# Altium PCB PCB1.PcbDoc (part 6 of 6)
Units mil, origin at the board's own origin, x right, y up, seen from the top; angles counter-clockwise.
Board outline 1280 x 1960 mil, 2 copper layers (Top Layer, Bottom Layer); 44 components, 63 nets, 315 pads, 89 vias.
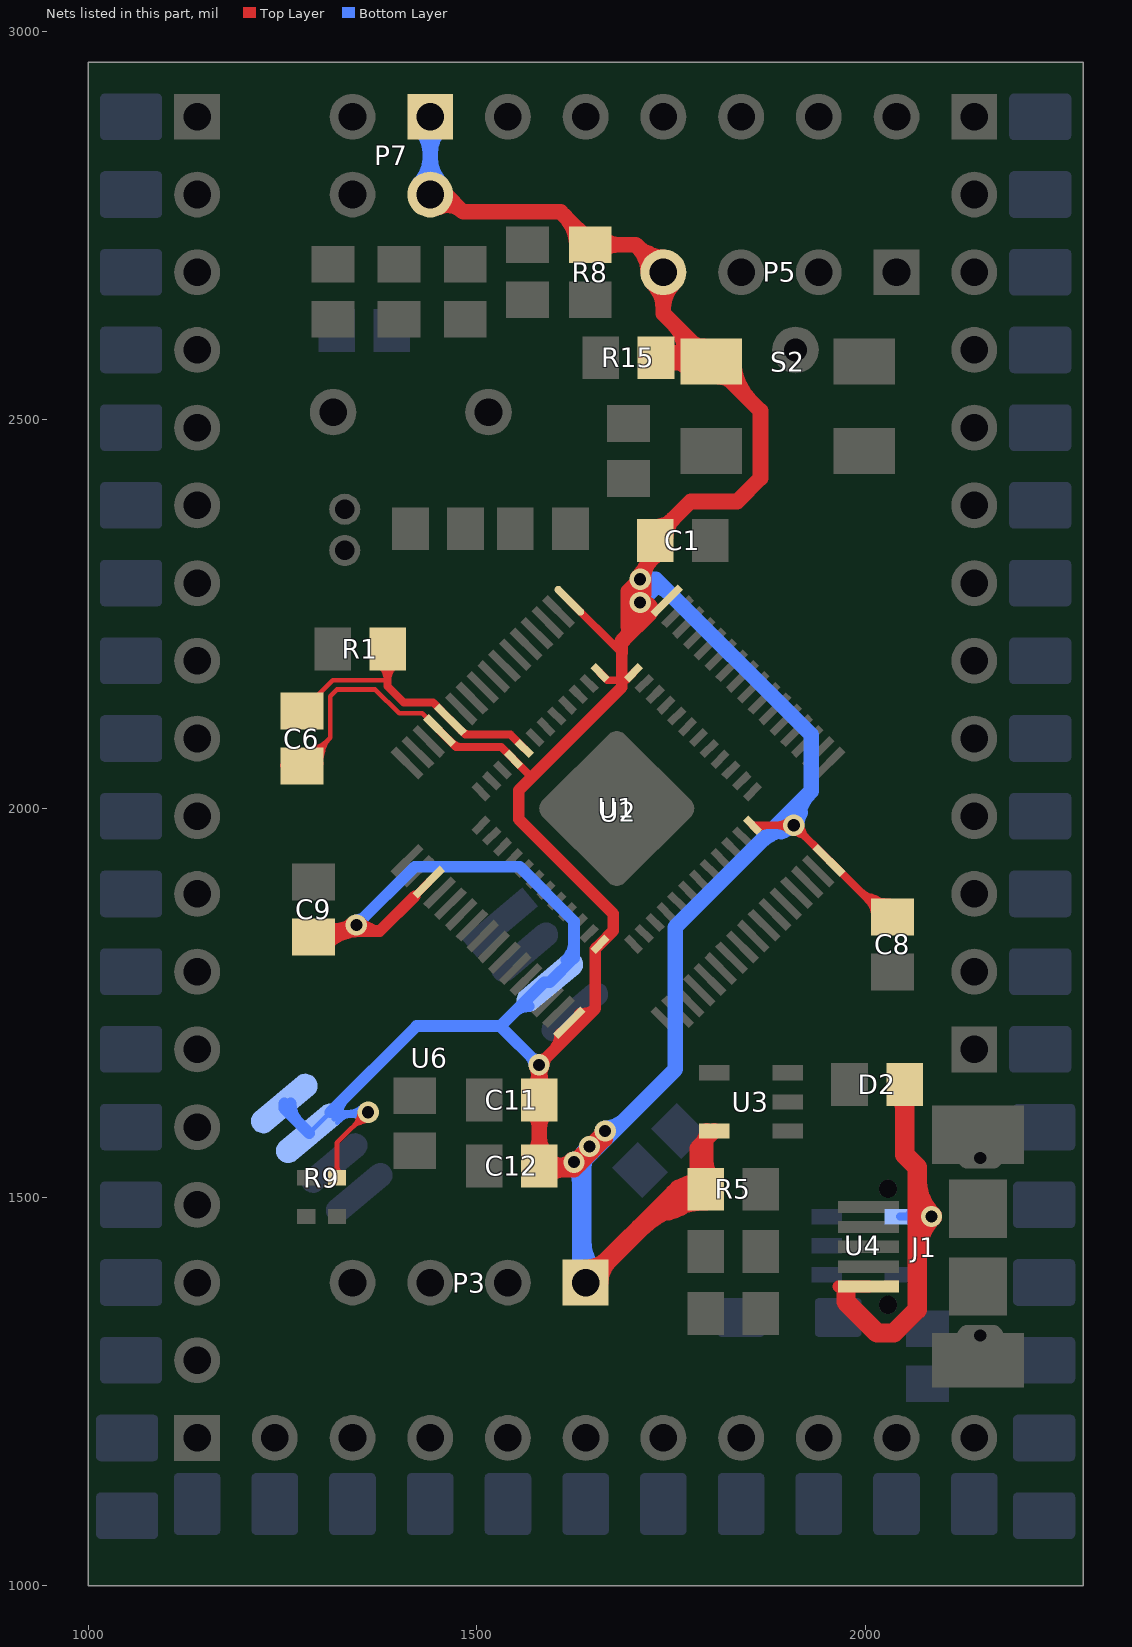
[diagram p6: the nets of this part, all layers, seen from the top]

## Via types
v1: diameter 27.56, hole 15.75, Top Layer to Bottom Layer, tented both sides, 85 vias
v2: diameter 23.62, hole 13.78, Top Layer to Bottom Layer, tented both sides, 4 vias

## Nets (pads, with @x,y where several pads share a name; then routed paths per layer and width w, separated by ;. In a path a pad name is that pad's centre, name@x,y a point inside that pad or via, vN(x,y) a via of type N, cw(c..) or ccw(c..) an arc to the next point about the centre after c; other vN are vias at no path point) (continued)
VCC: C1.1 C6.1 C8.1 C9.1 C11.1 C12.1 P3.1 P5.4 P7.1 P7.2 R5.2 R8.1 R9.1 R15.1 S2.2 U1.1 U1.9 U1.24 U1.36 U1.48 U2.1 U2.13 U2.19 U2.32 U2.48 U2.64 U3.5 U6.3 U6.7 U6.8 | length 12393.1
  Top Layer w6: C6.1@1250,2054.57 C6.1@1250,2056.25 ; C6.1@1269.64,2055.79 cw(c1295.87,2052.34) C6.1@1289.02,2077.89 ; C6.1@1275,2054.57 1311.56,2091.13 ; C6.1@1275.59,2055.01 cw(c1305.51,2051.06) 1297.7,2080.22 ; C6.1@1283.96,2046.65 ccw(c1262.34,2080.71) C6.1@1302.2,2074.5 ; R9.1@1320,1525 1320,1570 v1@1360,1610 ; 1346.23,1597.85 cw(c1362.64,1593.45) v1@1359.8,1610.2 ; 1347.8,1594.95 ccw(c1342.95,1613.06) v1@1361.19,1608.72 ; U2.13@1452,2100.2 1429.89,2122.32 1400.07,2122.32 1369.39,2153 1320,2153 1311.56,2144.56 1311.56,2091.13 ; 1311.56,2091.13 ccw(c1341.4,2061.29) 1299.44,2056.77 cw(c1341.4,2061.29) 1311.56,2091.13 ; 1320,1541.52 ccw(c1336.52,1541.52) 1324.84,1529.84 cw(c1336.52,1541.52) 1320,1541.52 ; 1320,1541.52 cw(c1303.48,1541.52) 1315.16,1529.84 ccw(c1303.48,1541.52) 1320,1541.52 ; C6.1@1278.94,2069.19 ccw(c1278.94,2094.99) 1297.18,2076.75 cw(c1278.94,2094.99) C6.1@1278.94,2069.19 ; C6.1@1278.94,2075.19 ccw(c1278.94,2115.47) 1307.42,2086.99 cw(c1278.94,2115.47) C6.1@1278.94,2075.19 ; C6.1@1287.51,2055.49 cw(c1309.37,2057.84) 1293.82,2073.39 ccw(c1309.37,2057.84) C6.1@1287.51,2055.49 ; C6.1@1293.48,2056.13 cw(c1325.38,2059.57) 1302.69,2082.26 ccw(c1325.38,2059.57) C6.1@1293.48,2056.13 ; 1339.89,1589.89 cw(c1360,1569.78) 1360,1598.22 ccw(c1360,1569.78) 1339.89,1589.89 ; 1342.31,1592.31 ccw(c1325.61,1609) 1349.22,1609 cw(c1325.61,1609) 1342.31,1592.31
  Top Layer w10: 1420,1887.25 U2.19@1438.08,1905.33 ; U2.13@1452,2100.2 1473.21,2079 1531.4,2079 U1.9@1547.07,2063.33 1570,2040.4 1570,2039.51 ; C11.1@1580.43,1625 C11.1@1580.43,1644.57 ; U2.1@1619.04,2267.24 1686.27,2200 1686.97,2200 ; U1.1@1658.42,2174.69 1668.11,2165 1686.27,2165 1691.89,2165 U1.48@1701.58,2174.69 ; v1(1710,2265) 1713.98,2268.98 1720,2275 1720,2306.57 1716.73,2309.84 ; U1.36@1854.69,1978.42 v1(1907.85,1978.42) U2.48@1953.1,1933.17 2025.84,1860.43 C8.1@2035,1860.43 ; v1@1906.65,1978.18 ccw(c1920.72,1981.06) 1917,1967.19 ; v1@1908.09,1979.62 cw(c1905.21,1965.56) 1919.08,1969.27 ; 2006.89,1885.53 cw(c1997.45,1850.29) C8.1@2032.38,1860.83 ; 1886.65,1978.42 ccw(c1886.65,1999.62) 1901.64,1984.63 cw(c1886.65,1999.62) 1886.65,1978.42 ; 1886.65,1978.42 cw(c1886.65,1957.23) 1901.64,1972.22 ccw(c1886.65,1957.23) 1886.65,1978.42 ; 1922.84,1963.44 ccw(c1907.85,1948.45) 1907.85,1969.64 cw(c1907.85,1948.45) 1922.84,1963.44 ; 1922.84,1963.44 cw(c1937.82,1978.42) 1916.63,1978.42 ccw(c1937.82,1978.42) 1922.84,1963.44 ; U2.13@1466.15,2086.06 ccw(c1483.19,2103.11) 1483.19,2079 cw(c1483.19,2103.11) U2.13@1466.15,2086.06 ; U1.36@1860.2,1972.91 cw(c1873.51,1959.6) 1873.51,1978.42 ccw(c1873.51,1959.6) U1.36@1860.2,1972.91 ; 1990.35,1895.92 ccw(c2031.06,1936.63) 2031.06,1879.06 cw(c2031.06,1936.63) 1990.35,1895.92 ; 2002.97,1883.3 cw(c1980.1,1860.43) 2012.44,1860.43 ccw(c1980.1,1860.43) 2002.97,1883.3 ; 2007.42,1878.85 ccw(c2031.06,1902.49) 2031.06,1869.06 cw(c2031.06,1902.49) 2007.42,1878.85
  Top Layer w15: C9.1@1290,1834.57 1297.68,1842.25 1375,1842.25 ; C9.1@1302,1848.53 ccw(c1316.39,1873.46) 1323.84,1845.65 ; C9.1@1308,1826.68 cw(c1349.1,1803.64) v1@1336.9,1849.16 ; 1323.28,1841.29 cw(c1336.52,1818.35) v1@1343.37,1843.93 ; 1324.93,1845.42 cw(c1332.71,1831.94) v1@1341.47,1844.81 ; v1@1348.93,1845.1 cw(c1355.7,1836.65) 1361.93,1845.51 ; 1420,1887.25 1375,1842.25 ; C11.1@1580.43,1644.57 1580.43,1670.43 1652.5,1742.5 ; 1686.27,2200 1686.27,2165 1686.27,2155.78 1570,2039.51 1554,2023.5 1554,1986 1675.53,1864.47 1675.53,1842.42 U1.24@1658.42,1825.31 1652.5,1819.39 1652.5,1742.5 ; 1686.97,2200 1686.97,2215.28 ; 1375,1842.25 cw(c1375,1875.05) 1349.82,1854.03 ccw(c1375,1875.05) 1375,1842.25 ; v1@1574.56,1666.86 cw(c1558.56,1657.62) 1576.41,1652.84 ; v1@1574.56,1666.86 cw(c1558.56,1657.62) 1576.41,1652.84 ; v1@1574.56,1666.86 cw(c1558.56,1657.62) 1576.41,1652.84 ; v1@1576.86,1664.56 cw(c1569.51,1651.83) 1583.71,1655.64 ; v1@1576.86,1664.56 cw(c1569.51,1651.83) 1583.71,1655.64 ; v1@1576.86,1664.56 cw(c1569.51,1651.83) 1583.71,1655.64 ; v1@1580.43,1667.86 ccw(c1619.36,1667.86) 1591.83,1640.34 cw(c1619.36,1667.86) v1@1580.43,1667.86 ; v1@1580.43,1667.86 cw(c1541.51,1667.86) 1569.03,1640.34 ccw(c1541.51,1667.86) v1@1580.43,1667.86 ; 1583.88,1655 cw(c1598.97,1659.05) v1@1585.44,1666.86 ; 1583.88,1655 cw(c1598.97,1659.05) v1@1585.44,1666.86 ; 1583.88,1655 cw(c1598.97,1659.05) v1@1585.44,1666.86 ; 1590.72,1680.72 ccw(c1601.44,1670) 1586.28,1670 cw(c1601.44,1670) 1590.72,1680.72 ; 1590.72,1680.72 cw(c1580,1691.44) 1580,1676.28 ccw(c1580,1691.44) 1590.72,1680.72 ; 1652.5,1742.5 cw(c1636.28,1758.71) 1632.8,1736.05 ccw(c1636.28,1758.71) 1652.5,1742.5 ; C9.1@1305.34,1823.17 cw(c1351.4,1777.1) 1351.4,1842.25 ccw(c1351.4,1777.1) C9.1@1305.34,1823.17 ; C9.1@1311.12,1842.25 ccw(c1311.12,1883.88) 1340.56,1854.44 cw(c1311.12,1883.88) C9.1@1311.12,1842.25 ; v1@1575.56,1665.56 cw(c1563.79,1653.79) 1580.43,1653.79 ccw(c1563.79,1653.79) v1@1575.56,1665.56 ; 1580.43,1655.89 cw(c1594.11,1655.89) 1584.44,1665.56 ccw(c1594.11,1655.89) 1580.43,1655.89 ; 1598.31,1688.31 ccw(c1576.39,1710.24) 1607.39,1710.24 cw(c1576.39,1710.24) 1598.31,1688.31
  Top Layer w20: P7.2@1440,2790 1460,2790 1482.28,2767.72 ; C11.1@1580.43,1605 C12.1@1580.43,1540 C12.1@1600,1540 ; C12.1@1590.07,1526.43 cw(c1610.39,1506.11) 1610.39,1534.85 ; C12.1@1590.07,1530.37 cw(c1613.32,1507.11) 1613.32,1540 cw(c1613.32,1572.89) C12.1@1590.07,1549.63 ; C12.1@1590.07,1545.7 ccw(c1616.25,1571.88) v1@1616.25,1534.85 ; C12.1@1591.36,1527.93 cw(c1605.15,1517.65) 1605.15,1534.85 ; C12.1@1592.46,1542.47 ccw(c1605.15,1549.23) 1605.15,1534.85 ; C12.1@1603.8,1540 ccw(c1603.8,1566.2) v1@1622.33,1547.67 ; v1@1621.45,1546.28 cw(c1605.15,1552.18) 1605.15,1534.85 ; v1@1625,1548.78 ccw(c1625,1582.77) v1@1649.04,1558.74 ; v1@1630.08,1547.79 ccw(c1618.84,1567.26) v1@1641.23,1565.32 ; v1@1631.26,1540.96 ccw(c1607.23,1565) v1@1641.22,1565 ; v1@1645.69,1568.72 ccw(c1649.67,1590.03) v1@1665,1574.7 ; v1@1650.82,1566.51 ccw(c1640.42,1584.53) v1@1661.22,1584.93 ; v1@1651.26,1560.96 ccw(c1627.23,1585) v1@1661.22,1585 ; 1698.32,2230.49 1695,2233.81 1695,2279.59 1707.54,2292.13 cw(c1697.71,2280.67) 1710.43,2272.53 1713.98,2268.98 1723.23,2259.73 1723.23,2251.55 1686.97,2215.28 ccw(c1640.33,2261.93) v1@1706.22,2264.83 ; v1@1707.33,2297.67 ccw(c1664.66,2340.34) C1.1@1725,2340.34 ; v1(1710,2265) 1710,2280 ; 1714.08,2713.86 ccw(c1746.68,2722.6) P5.4@1739.91,2689.54 ; v1@1715.02,2303.11 cw(c1754.72,2292.47) C1.1@1735.83,2328.97 ; 1716.14,2715.92 cw(c1707.4,2683.32) P5.4@1740.46,2690.09 ; C1.1@1725,2345 1775,2395 1835,2395 1865,2425 1865,2511.57 S2.2@1796.57,2580 ; R15.1@1725.43,2580 S2.2@1796.57,2580 ; R15.1@1740.07,2574.3 cw(c1761.72,2552.65) 1761.72,2583.27 ; R15.1@1740.07,2593.57 ccw(c1764.92,2618.42) S2.2@1764.92,2583.27 ; R15.1@1741.29,2567.84 cw(c1753.42,2558.64) 1757.36,2573.34 ; R15.1@1745.59,2588.45 cw(c1733.46,2543.18) S2.2@1774.59,2565.64 ; R15.1@1748.92,2587.56 ccw(c1760.19,2629.63) S2.2@1781.97,2591.91 ; 1764.29,2604.55 ccw(c1807,2616) S2.2@1791.57,2574.56 ; R5.2@1792.89,1510 R5.2@1794.57,1510 1794.57,1574.05 ; U3.5@1805.51,1585 1794.57,1574.05 ; 1482.28,2767.72 ccw(c1462.3,2747.73) 1449.11,2772.73 cw(c1462.3,2747.73) 1482.28,2767.72 ; 1482.28,2767.72 1607.72,2767.72 1650,2725.43 1704.57,2725.43 P5.4@1740,2690 1740,2636.57 S2.2@1796.57,2580 ; 1580.43,1588.18 ccw(c1547.55,1588.18) 1570.8,1611.43 cw(c1547.55,1588.18) 1580.43,1588.18 ; 1580.43,1588.18 cw(c1613.32,1588.18) 1590.07,1611.43 ccw(c1613.32,1588.18) 1580.43,1588.18 ; C12.1@1600,1540 1605.15,1534.85 ; C12.1@1600,1540 1620,1540 v1(1625,1545) v1(1645,1565) v1(1665,1585) v1@1665,1574.7 ; 1605.15,1534.85 1625.15,1534.85 v1@1665,1574.7 ; 1682.69,2725.43 ccw(c1682.69,2692.55) 1659.44,2715.8 cw(c1682.69,2692.55) 1682.69,2725.43 ; 1682.69,2725.43 cw(c1682.69,2758.32) 1659.44,2735.06 ccw(c1682.69,2758.32) 1682.69,2725.43 ; 1706.66,2723.34 ccw(c1740,2756.67) 1740,2709.53 cw(c1740,2756.67) 1706.66,2723.34 ; 1706.66,2723.34 cw(c1673.33,2690) 1720.47,2690 ccw(c1673.33,2690) 1706.66,2723.34 ; 1740,2642.86 ccw(c1692.86,2642.86) 1726.19,2676.19 cw(c1692.86,2642.86) 1740,2642.86 ; 1740,2642.86 cw(c1787.14,2642.86) 1753.81,2676.19 ccw(c1787.14,2642.86) 1740,2642.86 ; R15.1@1751.1,2583.27 ccw(c1758.95,2612.58) S2.2@1778.9,2589.72 ; R15.1@1751.1,2583.27 ccw(c1758.95,2612.58) S2.2@1778.9,2589.72 ; R15.1@1751.1,2583.27 ccw(c1758.95,2612.58) S2.2@1778.9,2589.72 ; R15.1@1751.43,2583.19 cw(c1741.46,2545.97) S2.2@1774.82,2565.24 ; R15.1@1751.43,2583.19 cw(c1741.46,2545.97) S2.2@1774.82,2565.24 ; R15.1@1751.43,2583.19 cw(c1741.46,2545.97) S2.2@1774.82,2565.24 ; S2.2@1763.32,2580 ccw(c1763.32,2547.11) 1740.07,2570.37 cw(c1763.32,2547.11) S2.2@1763.32,2580 ; S2.2@1763.32,2580 cw(c1763.32,2612.89) 1740.07,2589.63 ccw(c1763.32,2612.89) S2.2@1763.32,2580 ; 1783.57,1538.57 ccw(c1794.58,1538.57) 1794.57,1527.56 cw(c1794.58,1538.57) 1783.57,1538.57 ; 1783.57,1538.57 1783.57,1563.06 ; 1783.57,1563.05 ccw(c1831.25,1563.05) 1802.72,1524.85 cw(c1831.25,1563.05) 1783.57,1563.05 ; 1783.57,1563.06 1794.57,1574.05 ; 1794.57,1546.82 ccw(c1827.45,1546.82) 1804.2,1523.57 cw(c1827.45,1546.82) 1794.57,1546.82 ; 1794.57,1546.82 cw(c1761.68,1546.82) 1784.93,1523.57 ccw(c1761.68,1546.82) 1794.57,1546.82 ; C12.1@1570.8,1553.57 ccw(c1547.55,1576.82) 1580.43,1576.82 cw(c1547.55,1576.82) C12.1@1570.8,1553.57 ; 1580.43,1576.83 ccw(c1613.32,1576.83) 1590.07,1553.57 cw(c1613.32,1576.83) 1580.43,1576.83 ; 1612.97,2762.46 cw(c1575.94,2725.43) 1628.31,2725.43 ccw(c1575.94,2725.43) 1612.97,2762.46 ; C1.1@1729.57,2362.56 ccw(c1729.57,2393.93) 1751.75,2371.75 cw(c1729.57,2393.93) C1.1@1729.57,2362.56 ; R15.1@1732.52,2580 cw(c1732.52,2515.79) 1777.92,2561.19 ccw(c1732.52,2515.79) R15.1@1732.52,2580 ; C1.1@1743.19,2348.94 cw(c1777.59,2348.94) 1753.26,2373.27 ccw(c1777.59,2348.94) C1.1@1743.19,2348.94 ; 1751.44,2625.14 cw(c1701.3,2575) 1772.2,2575 ccw(c1701.3,2575) 1751.44,2625.14 ; 1756.66,2580 ccw(c1756.66,2610.07) 1777.92,2588.81 cw(c1756.66,2610.07) 1756.66,2580 ; S2.2@1775.2,2601.38 ccw(c1791.73,2617.91) 1791.73,2594.53 cw(c1791.73,2617.91) S2.2@1775.2,2601.38 ; 1788.98,1568.47 ccw(c1772.45,1585) 1795.83,1585 cw(c1772.45,1585) 1788.98,1568.47 ; S2.2@1811.42,2555.47 cw(c1811.42,2532.09) 1827.95,2548.62 ccw(c1811.42,2532.09) S2.2@1811.42,2555.47 ; S2.2@1830.94,2575 ccw(c1901.85,2575) 1851.71,2524.86 cw(c1901.85,2575) S2.2@1830.94,2575
  Top Layer w25: P3.1@1640,1390 1760,1510 R5.2@1792.89,1510 ; 1746.36,1482.02 ccw(c1729.92,1543.39) R5.2@1784.93,1511.62 ; P3.1@1669.07,1419.07 ccw(c1698.14,1390) 1657.03,1390 cw(c1698.14,1390) P3.1@1669.07,1419.07 ; P3.1@1669.07,1419.07 cw(c1640,1448.14) 1640,1407.03 ccw(c1640,1448.14) P3.1@1669.07,1419.07 ; 1767.72,1510 ccw(c1767.72,1536.85) 1786.7,1517.86 cw(c1767.72,1536.85) 1767.72,1510 ; 1767.72,1510 cw(c1767.72,1483.15) 1786.7,1502.14 ccw(c1767.72,1483.15) 1767.72,1510 ; 1709.85,1459.85 cw(c1794.57,1375.14) 1794.57,1494.94 ccw(c1794.57,1375.14) 1709.85,1459.85 ; 1752.53,1502.53 cw(c1794.57,1460.49) 1794.57,1519.94 ccw(c1794.57,1460.49) 1752.53,1502.53
  Bottom Layer w6: U6.7@1284.35,1582.03 1311.32,1609 v1(1360,1609) ; 1333.14,1603.84 cw(c1339.56,1579.91) v1@1353.8,1600.18 ; 1333.14,1603.84 cw(c1339.56,1579.91) v1@1353.8,1600.18 ; 1333.14,1603.84 cw(c1339.56,1579.91) v1@1353.8,1600.18 ; 1333.98,1609 ccw(c1333.98,1635.02) 1352.38,1616.62 cw(c1333.98,1635.02) 1333.98,1609 ; 1333.98,1609 cw(c1333.98,1582.98) 1352.38,1601.38 ccw(c1333.98,1582.98) 1333.98,1609 ; 1338.94,1605.4 ccw(c1333.95,1624.04) v1@1350.66,1614.39 ; 1338.94,1605.4 ccw(c1333.95,1624.04) v1@1350.66,1614.39 ; 1338.94,1605.4 ccw(c1333.95,1624.04) v1@1350.66,1614.39 ; 1345.54,1607.16 cw(c1349.18,1593.6) v1@1357.25,1605.09 ; 1345.54,1607.16 cw(c1349.18,1593.6) v1@1357.25,1605.09 ; 1345.54,1607.16 cw(c1349.18,1593.6) v1@1357.25,1605.09 ; U6.7@1316.27,1600.04 cw(c1337.91,1578.4) 1337.91,1609 ccw(c1337.91,1578.4) U6.7@1316.27,1600.04 ; U6.7@1320.51,1595.79 cw(c1352.39,1563.91) 1352.39,1609 ccw(c1352.39,1563.91) U6.7@1320.51,1595.79 ; U6.7@1320.51,1613.82 ccw(c1332.15,1625.46) 1332.15,1609 cw(c1332.15,1625.46) U6.7@1320.51,1613.82
  Bottom Layer w15: U6.8@1252.21,1620.33 1252.21,1614.17 U6.7@1284.35,1582.03 ; U6.7@1311.32,1609 1422.32,1720 1530,1720 ; v1(1345,1850) 1420,1925 1555,1925 1625,1855 1625,1807.59 U6.3@1593.96,1776.55 1586.55,1776.55 1530,1720 ; v1(1580,1670) 1530,1720 ; 1355.72,1860.72 ccw(c1366.44,1850) 1351.28,1850 cw(c1366.44,1850) 1355.72,1860.72 ; 1355.72,1860.72 cw(c1345,1871.44) 1345,1856.28 ccw(c1345,1871.44) 1355.72,1860.72 ; 1569.28,1680.72 ccw(c1580,1691.44) 1580,1676.28 cw(c1580,1691.44) 1569.28,1680.72 ; 1569.28,1680.72 cw(c1558.56,1670) 1573.72,1670 ccw(c1558.56,1670) 1569.28,1680.72 ; U6.8@1260.46,1620.33 ccw(c1295.25,1620.33) 1270.65,1595.73 cw(c1295.25,1620.33) U6.8@1260.46,1620.33 ; U6.7@1319.74,1604.81 cw(c1350.2,1604.81) 1328.66,1626.34 ccw(c1350.2,1604.81) U6.7@1319.74,1604.81 ; 1547.55,1737.55 cw(c1566.81,1718.28) 1566.81,1745.53 ccw(c1566.81,1718.28) 1547.55,1737.55 ; U6.3@1615.27,1805.16 ccw(c1591.78,1828.65) 1625,1828.65 cw(c1591.78,1828.65) U6.3@1615.27,1805.16
  Bottom Layer w20: P7.2@1440,2790 P7.1@1440,2890 ; v1@1625,1548.78 ccw(c1625,1584.48) v1@1650.25,1559.24 ; v1@1630.43,1547.8 ccw(c1619.6,1566.56) v1@1641.23,1565.23 ; v1@1641.29,1564.3 cw(c1618.89,1560.11) 1635,1543.99 1755.22,1664.21 1755.22,1847.34 1930,2022.11 1930,2095 1730,2295 v1(1710,2295) v1(1710,2265) 1729.3,2284.3 ; v1@1645,1568.78 ccw(c1645,1604.48) v1@1670.25,1579.24 ; v1@1650.43,1567.8 ccw(c1639.6,1586.56) v1@1661.23,1585.23 ; v1@1650.76,1559.75 ccw(c1625.52,1585) v1@1661.22,1585 ; v1@1665,1588.78 ccw(c1665,1624.48) 1690.25,1599.24 ; v1@1713.27,2296.89 ccw(c1731.97,2307.68) 1726.38,2286.83 ; 1891.47,1970.25 ccw(c1885.88,1991.11) v1@1904.57,1980.31 ; v1@1905.96,1981.7 ccw(c1895.16,2000.39) 1916.02,1994.81 ; 1440,2837.14 ccw(c1487.14,2837.14) 1453.81,2803.81 cw(c1487.14,2837.14) 1440,2837.14 ; 1440,2837.14 cw(c1392.86,2837.14) 1426.19,2803.81 ccw(c1392.86,2837.14) 1440,2837.14 ; 1440,2842.86 ccw(c1392.86,2842.86) 1426.19,2876.19 cw(c1392.86,2842.86) 1440,2842.86 ; 1440,2842.86 cw(c1487.14,2842.86) 1453.81,2876.19 ccw(c1487.14,2842.86) 1440,2842.86 ; v1@1710,2291.22 cw(c1710,2233.81) 1750.59,2274.41 ccw(c1710,2233.81) v1@1710,2291.22 ; 1864.63,1956.74 cw(c1907.85,1913.52) 1907.85,1974.64 ccw(c1907.85,1913.52) 1864.63,1956.74 ; 1891.63,1978.42 cw(c1904.47,1978.42) 1895.39,1987.5 ccw(c1904.47,1978.42) 1891.63,1978.42 ; 1898.77,1990.88 cw(c1907.85,1981.81) 1907.85,1994.64 ccw(c1907.85,1981.81) 1898.77,1990.88 ; v1@1911.63,1978.42 cw(c1972.75,1978.42) 1929.53,2021.65 ccw(c1972.75,1978.42) v1@1911.63,1978.42
  Bottom Layer w25: v1@1624.1,1544.1 cw(c1597.77,1517.77) 1635,1517.77 ; v1@1635,1537.77 cw(c1672.23,1537.77) v1@1645.9,1564.1 ; v1@1635,1541.73 cw(c1663.36,1541.73) v1@1645.79,1564 ; v1@1635,1543.99 1635,1420 ; 1635,1420 ccw(c1649.41,1420) 1645.1,1406.25 cw(c1649.41,1420) 1635,1420 ; 1635,1443.18 ccw(c1693.18,1443.18) 1652.04,1402.04 cw(c1693.18,1443.18) 1635,1443.18
VCC5V: D2.1 J1.1 U4.4 | length 916.8
  Top Layer w15: J1.1@1964.82,1384.82 J1.1@2004.13,1384.82
  Top Layer w25: 1975,1375 1975,1365 2015,1325 2036.5,1325 2066.5,1355 2066.5,1538.5 2050.43,1554.57 D2.1@2050.43,1645 ; 2050.43,1614.21 ccw(c2023.58,1614.21) 2042.57,1633.2 cw(c2023.58,1614.21) 2050.43,1614.21 ; 2050.43,1614.21 cw(c2077.28,1614.21) 2058.3,1633.2 ccw(c2077.28,1614.21) 2050.43,1614.21 ; 2066.5,1427.25 cw(c2132.75,1427.25) 2085.9,1474.1 ccw(c2132.75,1427.25) 2066.5,1427.25 ; 2066.5,1522.75 ccw(c2132.75,1522.75) 2085.9,1475.9 cw(c2132.75,1522.75) 2066.5,1522.75
  Bottom Layer w10: U4.4@2044.49,1474.8 2084.8,1474.8 v1(2085,1475) ; U4.4@2056.99,1478.85 ccw(c2066.09,1492.66) 2070.37,1476.69 ; 2066.02,1474.8 ccw(c2066.02,1463.11) 2057.75,1471.38 cw(c2066.02,1463.11) 2066.02,1474.8 ; 2066.02,1474.8 cw(c2066.02,1486.49) 2057.75,1478.23 ccw(c2066.02,1486.49) 2066.02,1474.8 ; U4.4@2063.33,1474.8 ccw(c2063.33,1496.67) 2078.79,1481.21 cw(c2063.33,1496.67) U4.4@2063.33,1474.8 ; 2064.28,1474.8 cw(c2064.28,1454.28) 2078.79,1468.79 ccw(c2064.28,1454.28) 2064.28,1474.8
VSSA: C6.2 R1.1 U1.8 U2.12 | length 507.9
  Top Layer w6: C6.2@1275,2125.43 1314.57,2165 1385,2165 ; R1.1@1385.43,2185.43 R1.1@1385.43,2205
  Top Layer w10: R1.1@1385.43,2185.43 1385,2185 1385,2165 ; U1.8@1560.99,2077.25 1543.24,2095 1485.05,2095 U2.12@1465.92,2114.12 1443.73,2136.32 1405.87,2136.32 1385,2157.19 1385,2165 ; 1385,2165 ccw(c1358.77,2165) 1374.36,2186.09 cw(c1358.77,2165) 1385,2165 ; 1385,2165 cw(c1410.03,2165) 1395.93,2185.68 ccw(c1410.03,2165) 1385,2165 ; U2.12@1480.07,2099.98 ccw(c1492.09,2112) 1492.09,2095 cw(c1492.09,2112) U2.12@1480.07,2099.98
pads on no net: J1.0@2029,1361.2 J1.0@2029,1510.8 J1.5 U3.4 U4.1
copper on no net:
  other v1: 1190,2890 1225,2890 1255,2890 1290,2890

## Polygon pours and split planes (outlines as drawn)
GND on Bottom Layer "Top Layer-No Net" (solid, remove dead copper, pour order 2): 2040,1644.64 2045.36,1650 2120,1650 2125,1650 2140,1635 2140,1505 2140,1325 2140,1240 2135,1240 2120,1225 1915,1225 1320,1225 1295,1250 1280,1265 1280,1394.3 1440,1554.3 1440,1680 1440,1554.3 1555.7,1670 1580,1670 1580,1710 1585,1715 1640,1770 1655,1770 1655,1777.59 1625,1807.59 1625,1855 1555,1925 1420,1925 1345,1850 1340,1845 1270,1845 1200,1915 1180,1935 1180,2020 1180,2050 1200,2070 1285,2070 1285,2065 1325,2025 1450,2150 1450,2178.94 1450,2189.78 1429.78,2210 1435,2215.22 1435,2244 1281,2244 1241,2284 1241,2789 1241,2801 1270,2830 1275,2835 1360,2835 1375,2835 1405,2805 1405,2765 1405,2760 1415,2750 1420,2745 1640,2745 1648.22,2736.78 1648.22,2611.48 1707,2552.7 1705,2550.7 1705,2405.04 1655.22,2355.26 1655,2355.04 1655,2222 1638,2205 1639.13,2203.87 1639.13,2171.09 1685.22,2217.18 1865,2037.4 1865,2030 1865,2005 1855,1995 1750,1890 1750,1669.43 1755.22,1664.21 1635.1,1544.1 1624.1,1544.1 1624.1,1539.1 1515,1430 1445,1430 1445,1395 1440,1390 1470,1360 1485,1360 1495,1360 1526.53,1328.47 1528.06,1330 1705,1330 1825,1330 1840,1345 1845,1340 1905,1340 1905,1355 1950,1400 1965,1400 1965,1480 1950,1480 1950,1554.64
GND on Top Layer "Top Layer-No Net" (solid, remove dead copper, pour order 4): 1228.5,2125 1228.5,2146.5 1215,2160 1215,2290 1215,2780 1220,2785 1272.14,2837.14 1340,2837.14 1372.86,2837.14 1400,2810 1405,2805 1405,2760 1405,2755 1415,2745 1600,2745 1615,2730 1600,2745 1595,2745 1585,2745 1540.43,2700.43 1470,2700.43 1470,2635 1475,2630 1482.36,2622.64 1609.81,2622.64 1609.81,2620.19 1645,2585 1695,2535 1695,2495.43 1695,2419.88 1691.06,2415.94 1691.06,2405.94 1691.06,2381.01 1680,2369.94 1680,2345 1680,2330 1640,2290 1578.94,2290

## Keep-outs
Keep-Out Layer:
  lines w6: 995,1035 995,2960 2285,2960 2285,1035 995,1035

## Other copper
Top Layer:
  rectangle net GND: 1995,1487.18 2010,1530

## Silkscreen, mask and mechanical layers (free items; w line width, h text height)
Top Overlay:
  lines w10: 1190,1490 1210,1490 1210,1300 1230,1280 ; 1190,2375 1220,2375 1220,2545 ; 1195,1590 1225,1590 1225,1900 ; 1195,2290 1225,2290 1225,1980 ; 1220,2620 1220,2760 ; 1300,1270 1625,1270 1635,1260 1635,1240 ; 1740,1240 1740,1260 1750,1270 1850,1270 ; 1920,1270 1975,1270 ; 2050,2175 2050,1990 2085,1990 ; 2050,2240 2050,2345
  text "." at 1055,2920 h60
  text "C0" at 1005,2870 h75
  text "B3" at 2200,2870 h75
  text "." at 1055,2820 h60
  text "." at 2260,2820 h60
  text "3V3" at 1285,2785 h75 r90
  text "GND" at 1240,2775 h75 r90
  text "C1" at 1005,2770 h75
  text "D2" at 2200,2770 h75
  text "B9" at 1555,2760 h75 r90
  text "B8" at 1655,2760 h75 r90
  text "B7" at 1755,2760 h75 r90
  text "B6" at 1855,2760 h75 r90
  text "B5" at 1955,2760 h75 r90
  text "B4" at 2065,2760 h75 r90
  text "." at 1055,2720 h60
  text "C" at 2215,2715 h75
  text "C2" at 1005,2670 h75
  text "13" at 2200,2670 h75
  text "." at 2260,2625 h60
  text "." at 1055,2620 h60
  text "C" at 2215,2615 h75
  text "C3" at 1005,2570 h75
  text "12" at 2200,2570 h75
  text "C" at 1195,2560 h100
  text "." at 2260,2525 h60
  text "." at 1055,2520 h60
  text "BT0" at 2081.53,2518.9 h75 r90
  text "C" at 2215,2515 h75
  text "C4" at 1005,2470 h75
  text "11" at 2200,2470 h75
  text "." at 2260,2425 h60
  text "." at 1055,2420 h60
  text "C" at 2215,2415 h75
  text "RES" at 2080,2380 h75 r90
  text "C5" at 1005,2370 h75
  text "10" at 2200,2370 h75
  text "." at 2260,2320 h60
  text "A0" at 1005,2270 h75
  text "C9" at 2200,2270 h75
  text "VCC" at 1875,2235 h75 r90
  text "GND" at 1925,2235 h75 r90
  text "SWD" at 1975,2235 h75 r90
  text "SCL" at 2025,2235 h75 r90
  text "." at 2260,2220 h60
  text "C" at 2030,2185 h100
  text "A1" at 1005,2170 h75
  text "C8" at 2200,2170 h75
  text "." at 2260,2120 h60
  text "A2" at 1005,2070 h75
  text "C7" at 2200,2070 h75
  text "." at 2260,2020 h60
  text "A3" at 1005,1970 h75
  text "C6" at 2200,1970 h75
  text "A" at 2215,1915 h75
  text "A" at 1195,1910 h100
  text "A4" at 1005,1870 h75
  text "15" at 2200,1870 h75
  text "A" at 2215,1815 h75
  text "A5" at 1005,1770 h75
  text "14" at 2200,1770 h75
  text "SCK" at 1240,1755 h75
  text "A" at 2215,1715 h75
  text "A6" at 1005,1670 h75
  text "13" at 2200,1670 h75
  text "MISO" at 1235,1665 h75
  text "." at 1960,1595 h60
  text "A7" at 1005,1570 h75
  text "MOSI" at 1235,1570 h75
  text "B0" at 1005,1470 h75
  text "BT1" at 1355,1470 h75
  text "B1" at 1005,1370 h75
  text "GND" at 1295,1280 h75
  text "TX" at 1435,1280 h75
  text "RX" at 1535,1280 h75
  text "VCC" at 1635,1280 h75
  text "B2" at 1005,1270 h75
  text "B" at 1240,1250 h100
  text "A" at 1860,1250 h100
  text "B" at 1115,1080 h75 r90
  text "B" at 1215,1080 h75 r90
  text "B" at 1315,1080 h75 r90
  text "B" at 1415,1080 h75 r90
  text "B" at 1515,1080 h75 r90
  text "B" at 1615,1080 h75 r90
  text "A" at 1915,1080 h75 r90
  text "A" at 2015,1080 h75 r90
  text "A" at 2115,1080 h75 r90
  text "10" at 1160,1060 h75 r90
  text "11" at 1265,1060 h75 r90
  text "12" at 1365,1060 h75 r90
  text "13" at 1465,1060 h75 r90
  text "14" at 1565,1060 h75 r90
  text "15" at 1665,1060 h75 r90
  text "A8" at 1765,1060 h75 r90
  text "A9" at 1865,1060 h75 r90
  text "10" at 1965,1060 h75 r90
  text "11" at 2065,1060 h75 r90
  text "12" at 2165,1060 h75 r90
  text "." at 1200,1055 h60
Bottom Overlay:
  text "B9" at 1555,2830 h75 r90
  text "B8" at 1655,2830 h75 r90
  text "B7" at 1755,2830 h75 r90
  text "B6" at 1855,2830 h75 r90
  text "B5" at 1955,2830 h75 r90
  text "B4" at 2020,2830 h75 r90
  text "B3" at 2080,2830 h75 r90
  text "C0" at 1275,2825 h75
  text "C1" at 1275,2770 h75
  text "GND" at 1400,2690 h75
  text "3V3" at 1520,2690 h75
  text "C2" at 1275,2670 h75
  text "D2" at 2085,2605 h75
  text "C3" at 1275,2570 h75
  text "C13" at 2090,2560 h75
  text "SCL" at 1645,2535 h75 r270
  text "VCC" at 1795,2527 h75 r270
  text "GND" at 1745,2525 h75 r270
  text "SWD" at 1695,2522 h75 r270
  text "C12" at 2090,2515 h75
  text "BT0" at 1955,2510 h75
  text "C4" at 1275,2470 h75
  text "C11" at 2090,2470 h75
  text "C5" at 1275,2370 h75
  text "C10" at 2090,2370 h75
  text "A0" at 1275,2270 h75
  text "C9" at 2080,2270 h75
  text "A1" at 1275,2170 h75
  text "C8" at 2080,2170 h75
  text "A2" at 1275,2070 h75
  text "C7" at 2080,2070 h75
  text "A3" at 1275,1970 h75
  text "C6" at 2080,1970 h75
  text "A" at 2065,1915 h75
  text "A4" at 1275,1870 h75
  text "15" at 2080,1870 h75
  text "." at 1450,1860 h60
  text "A" at 2065,1815 h75
  text "A5" at 1275,1785 h75
  text "14" at 2080,1770 h75
  text "A6" at 1275,1740 h75
  text "A" at 2065,1715 h75
  text "V1.4" at 1935,1710 h40
  text "13" at 2080,1670 h75
  text "1623" at 1965,1630 h100
  text "." at 1805,1555 h60
  text "A7" at 1275,1495 h75
  text "B0" at 1275,1445 h75
  text "TX" at 1530,1435 h75 r270
  text "RX" at 1580,1435 h75 r270
  text "VCC" at 1630,1435 h75 r270
  text "GND" at 1480,1430 h75 r270
  text "B1" at 1275,1370 h75
  text "B+" at 1794.57,1331.5 h75
  text "B-" at 1930,1330 h75
  text "B2" at 1275,1320 h75
  text "10" at 1245,1310 h75 r90
  text "11" at 1295,1310 h75 r90
  text "12" at 1365,1310 h75 r90
  text "13" at 1465,1310 h75 r90
  text "14" at 1565,1310 h75 r90
  text "15" at 1665,1310 h75 r90
  text "A8" at 1765,1310 h75 r90
  text "A9" at 1865,1310 h75 r90
  text "10" at 1955,1310 h75 r90
  text "11" at 2000,1310 h75 r90
  text "12" at 2045,1310 h75 r90
  text "B" at 1415,1290 h75 r90
  text "B" at 1515,1290 h75 r90
  text "B" at 1615,1290 h75 r90
  text "A" at 1910,1290 h75 r90